# Altium PCB PCB.pcbdoc
Units mil, origin at the board's own origin, x right, y up, seen from the top; angles counter-clockwise.
Board outline 3189.56 x 3700 mil, 2 copper layers (Top Layer, Bottom Layer); 37 components, 55 nets, 146 pads, 56 vias.
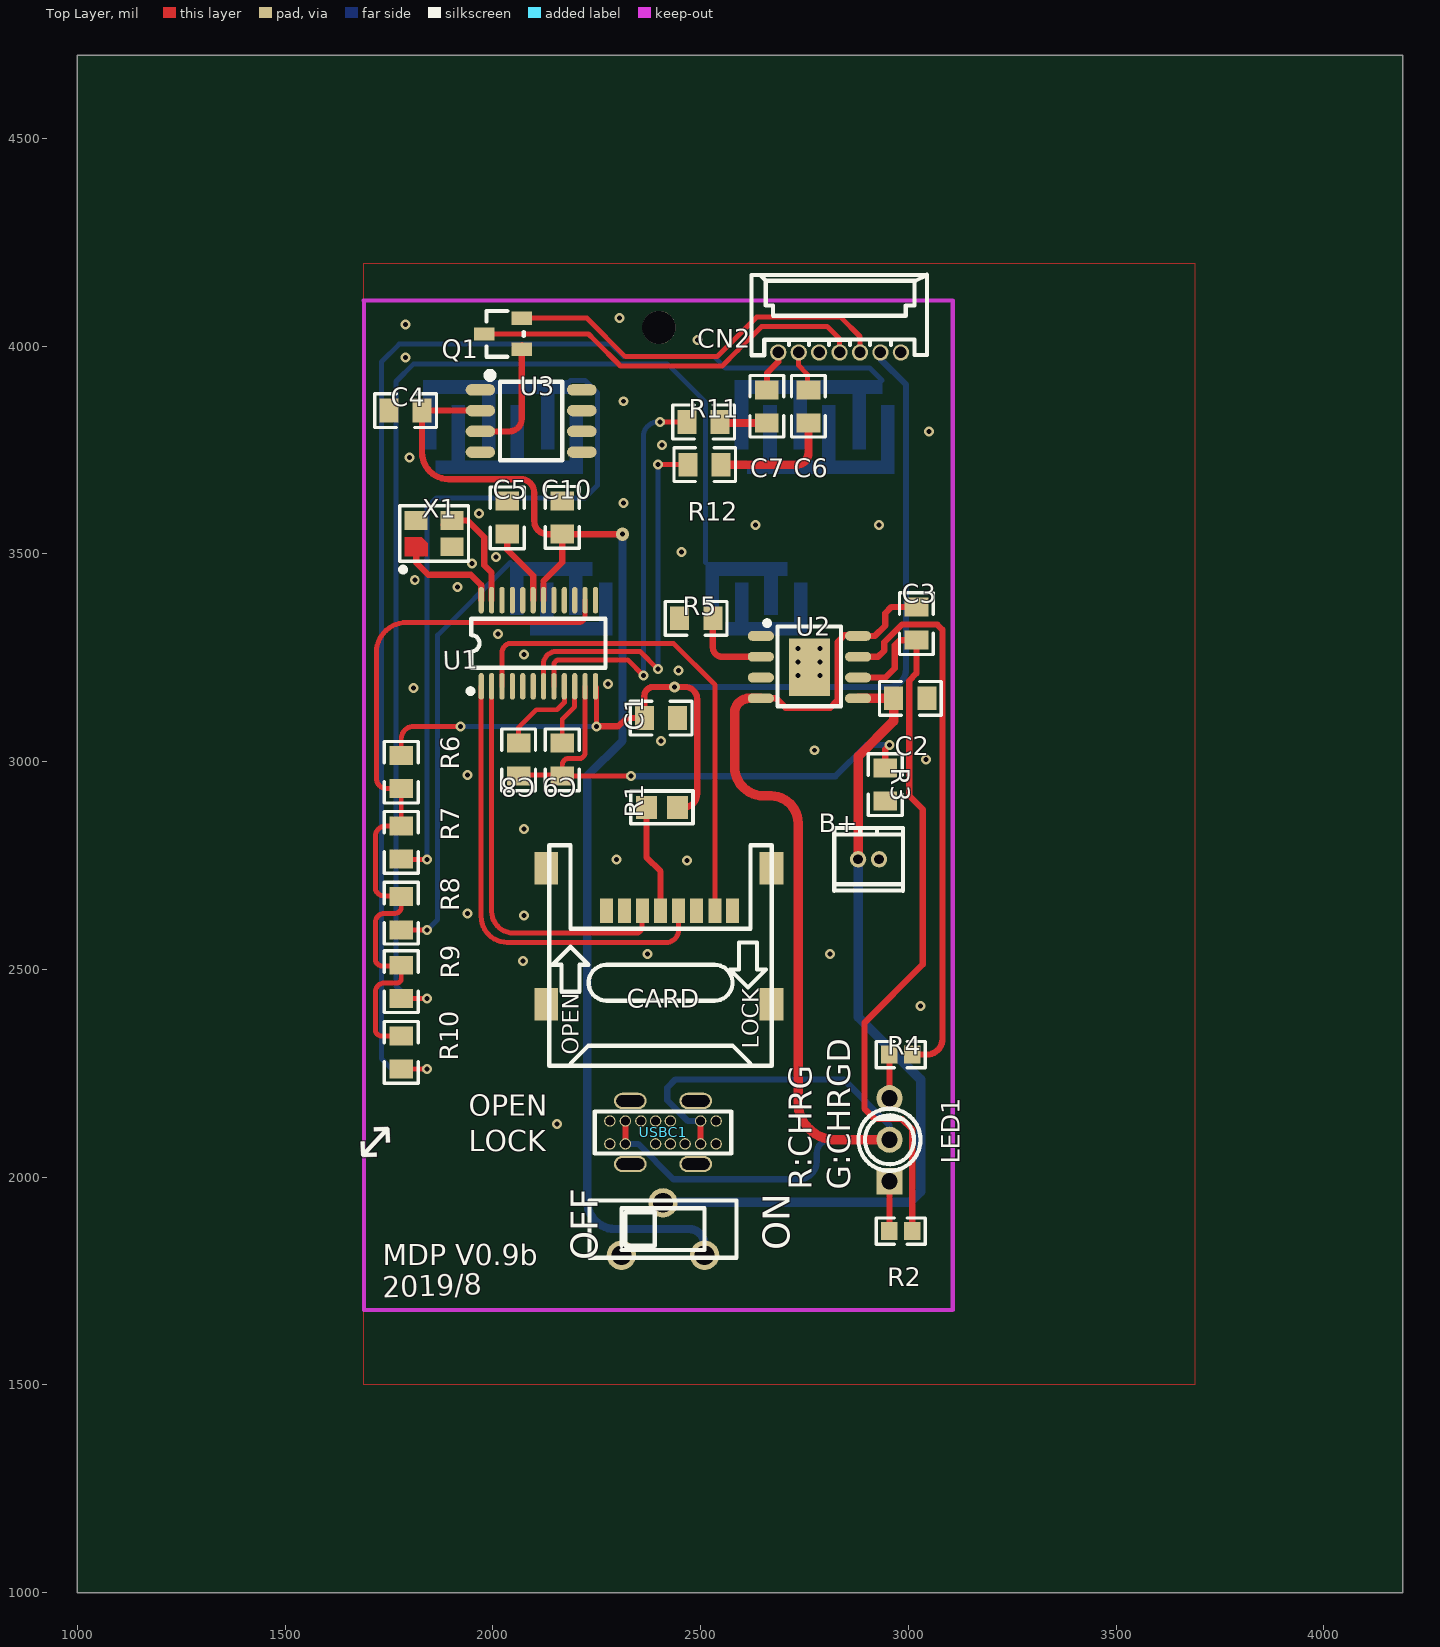
[diagram p0: Top Layer view]
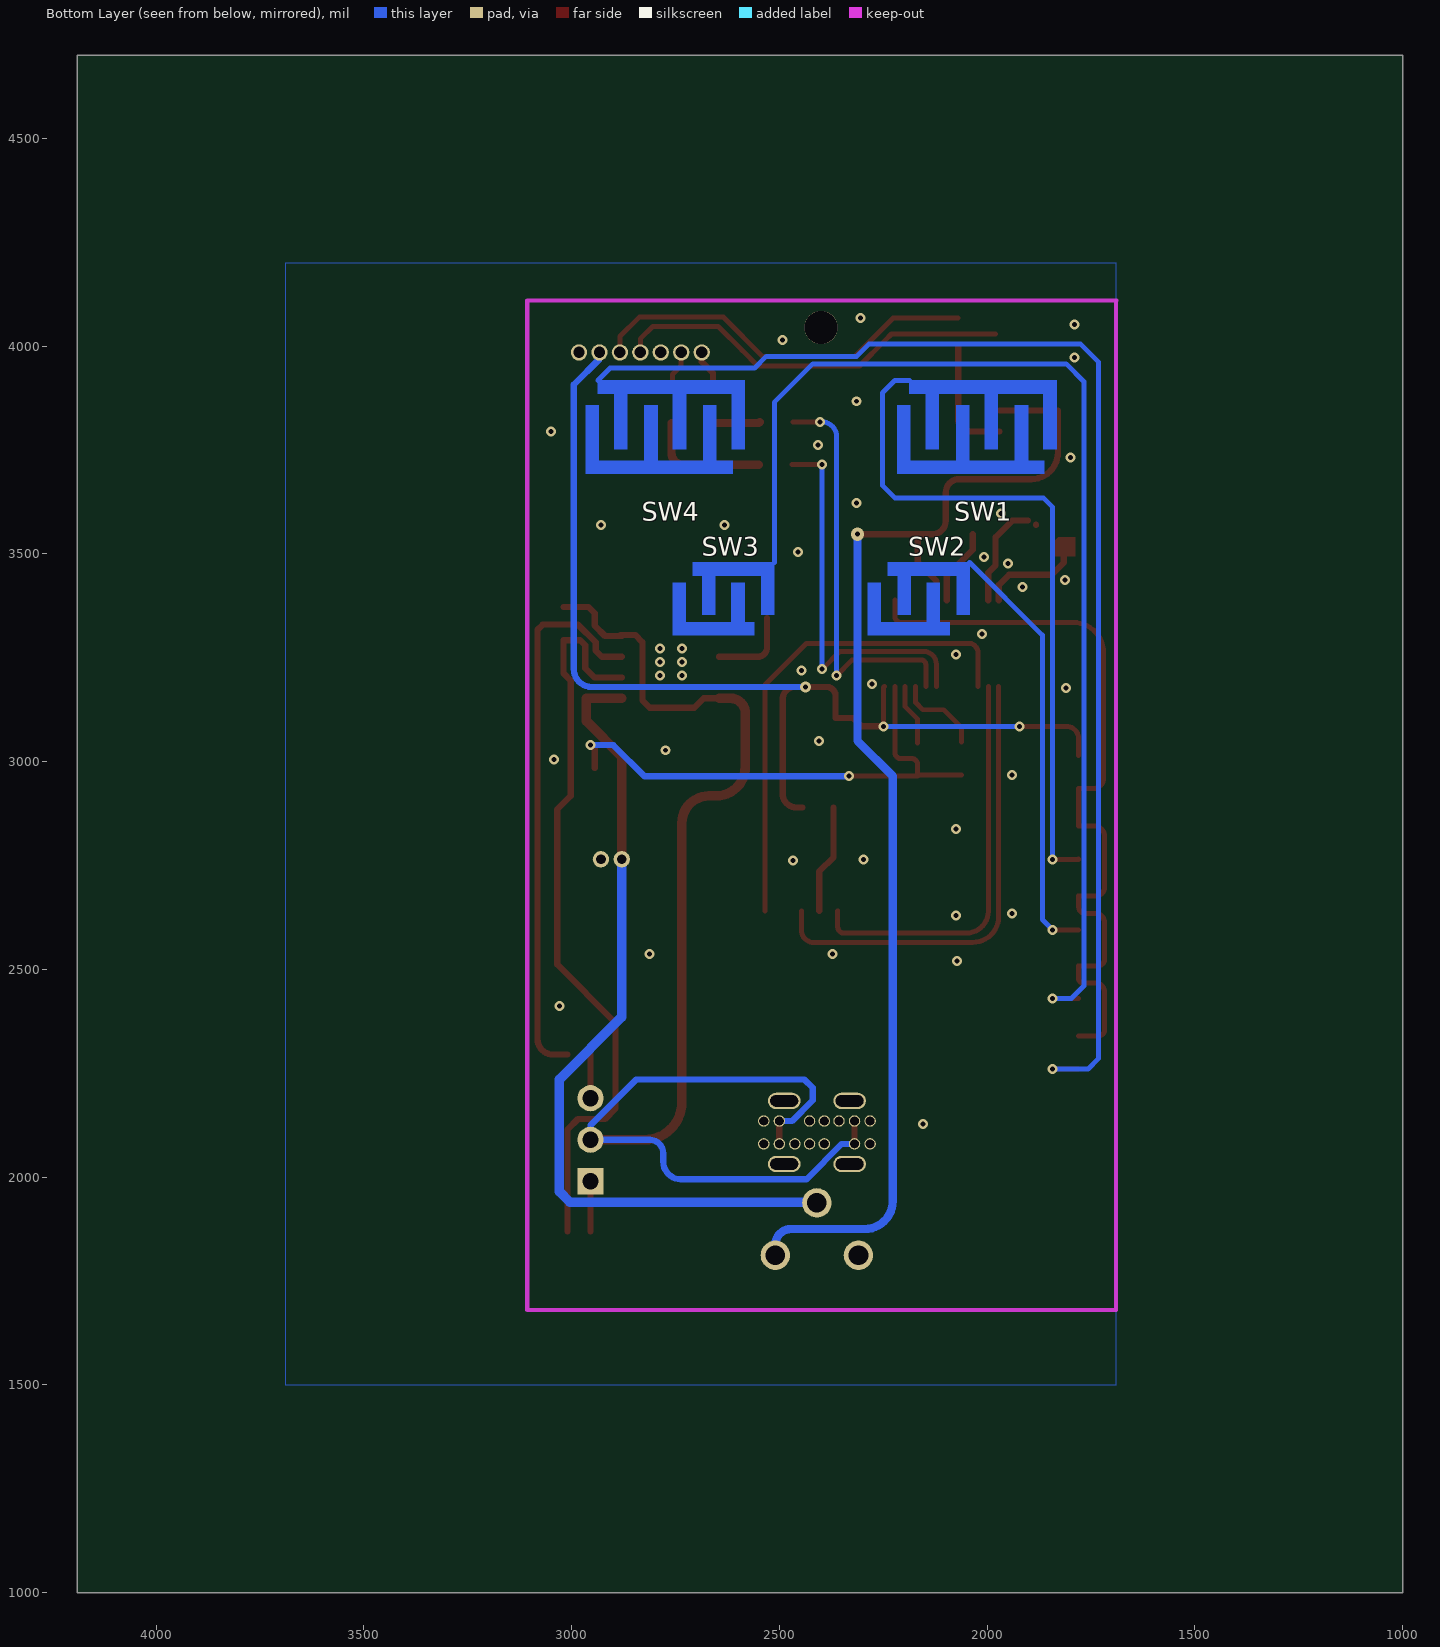
[diagram p1: Bottom Layer view, seen from below]

## Layer stack, top to bottom
Top Layer: signal copper (thickness not stored)
Dielectric: dielectric 12.6, FR-4, Dk 4.8
Bottom Layer: signal copper (thickness not stored)

## Board outline
4189.56,1000 1000,1000 1000,4700 4189.56,4700

## Components (designator, comment, footprint, x,y, rotation, side; value= is the part's Value field where it differs from the comment)
B+ "1.25T-2P-DP" 1.25T-2P-DP 2904.36,2765 r0 top
C1 "1uF" 0805 2404.56,3105 r180 top
C2 "10uF" 0805 3004.56,3152.5 r180 top
C3 "10uF" 0805 3019.56,3332.5 r90 top
C4 "1uF" 0805 1789.56,3845 r180 top
C5 "1uF" 0805 2034.56,3587.5 r90 top
C6 "10uF" 0805 2759.56,3855 r270 top
C7 "10uF" 0805 2659.56,3855 r270 top
C8 "1uF" 0805 2062.06,3005 r90 top
C9 "1uF" 0805 2167.06,3005 r90 top
C10 "10uF" 0805 2167.06,3587.5 r270 top
CARD "HYC40-TF08-150" TF-002-H18 2399.58,2580.01 r0 top
CN2 "1251R-7P" 1.25T-1-7AW 2834.56,3985 r0 top
LED1 "TJ-L3FYTXHMCYLC2R2G-A5" LED-DIP-3P(3.8MM) 2954.56,2090 r90 top
OFF "K3-1235D-L1" SW-DIP-9X3.5-3.5-3P 2409.56,1875 r90 top
Q1 "9013M-H" SOT-23 2024.56,4030 r90 top
R1 "4.7" R0805 2406.96,2890 r180 top
R2 "1K" 0603 2982,1870 r180 top
R3 "0" 0805 2944.56,2945 r90 top
R4 "1K" 0603 2982,2295 r0 top
R5 "1.4K" 0805 2489.56,3345 r0 top
R6 "22K" 0805 1779.56,2975 r90 top
R7 "0" 0805 1779.54,2805.58 r270 top
R8 "6.2K" 0805 1779.56,2635 r270 top
R9 "3K" 0805 1779.56,2470 r270 top
R10 "9.1K" 0805 1779.54,2300 r270 top
R11 "10" 0805 2507.06,3817.5 r180 top
R12 "10" 0805 2509.56,3715 r180 top
SW1 "PP" 硅胶按键 2024.56,3805 r0 bottom
SW2 "NEXT/VOL+" 硅胶按键-5 2164.56,3391.9 r0 bottom
SW3 "PERV/VOL-" 硅胶按键-5 2634.56,3391.9 r0 bottom
SW4 "MODE" 硅胶按键 2774.56,3805 r0 bottom
U1 "KT1025" QSOP-24_24PIN-L8.2-W6.0-H1.72-PITCH0.635-BL 2109.56,3285 r0 top
U2 "TP4056" SOP-8_EP_150MIL 2762.06,3227.5 r0 top
U3 "STC15F104E-35I-SOP8" SOP-8_150MIL 2092.06,3820 r0 top
USBC1 "TYPE-C母头 14PIN 直立式 DIP" TTPE-C-USB-14P 2409.55,2107.56 r180 top
X1 "24MHz" OSC-YSX-3225_4P 1858.75,3549 r0 top

## Footprints (in the part's own frame and the unit in brackets; to place one, negate y for a bottom-side part, rotate by r counter-clockwise, add the part's x,y. Pads: shape width x height; smd on the part's side, far side on the other; paste and mask are expansions set on the pad)
1.25T-1-7AW [mm]
  round 1 hole 0.7: 1(-3.75,0) 2(-2.501,0) 3(-1.251,0) 4(-0.001,0) 5(1.248,0) 6(2.498,0) 7(3.75,0)
  silkscreen extent -5.38,-0.17 5.34,4.75
1.25T-2P-DP [mm]
  round 1 hole 0.6: 1(-0.64,0) 2(0.64,0)
  silkscreen extent -2.1,-1.92 2.1,1.92
0603 [mm]
  rect 1x1.1 smd: 1(-0.7,0) 2(0.7,0)
  silkscreen extent -1.5,-0.8 1.5,0.8
0805 [mm]
  rect 1.16x1.45 smd: 1(-1.016,0) 2(1.016,0)
  silkscreen extent -1.9,-1.03 1.87,1.04
LED-DIP-3P(3.8MM) [mm]
  rect 1.6x1.6 hole 1: 1(-2.54,0)
  round 1.6 hole 1: 2(0,0) 3(2.54,0)
  silkscreen extent -1.9,-1.9 1.9,1.9
OSC-YSX-3225_4P [mm]
  round 0 smd: 1(-1.1,-0.8)
  rect 1.4x1.15 smd: 2(1.1,-0.8) 3(1.1,0.8) 4(-1.1,0.8)
  Top Layer region: -1.8,-0.225 -0.762,-0.225 -0.4,-0.604 -0.4,-1.375 -1.8,-1.375
  silkscreen extent -2.1,-2.35 2.1,1.7
QSOP-24_24PIN-L8.2-W6.0-H1.72-PITCH0.635-BL [mm]
  oval 0.32x1.63 smd: 1(-3.492,-2.635) 2(-2.857,-2.635) 3(-2.222,-2.635) 4(-1.587,-2.635) 5(-0.953,-2.635) 6(-0.318,-2.635) 7(0.318,-2.635) 8(0.953,-2.635) 9(1.587,-2.635) 10(2.222,-2.635) 11(2.857,-2.635) 12(3.492,-2.635) 13(3.492,2.635) 14(2.857,2.635) 15(2.222,2.635) 16(1.587,2.635) 17(0.953,2.635) 18(0.318,2.635) 19(-0.318,2.635) 20(-0.953,2.635) 21(-1.587,2.635) 22(-2.222,2.635) 23(-2.857,2.635) 24(-3.492,2.635)
  silkscreen extent -4.3,-3.08 4.1,1.5
R0805 [mil]
  rect 51.2x55.1 smd: 1(-37.4,0) 2(37.4,0)
  silkscreen extent -75,-39 75,39
SOP-8_150MIL [mm]
  oval 1.8x0.7 smd: 1(-3.099,1.905) 2(-3.099,0.635) 3(-3.099,-0.635) 4(-3.099,-1.905) 5(3.099,-1.905) 6(3.099,-0.635) 7(3.099,0.635) 8(3.099,1.905)
  silkscreen extent -2.71,-2.4 1.91,2.99
SOP-8_EP_150MIL [mm]
  oval 1.6x0.6 smd: 1(-2.972,1.905) 2(-2.972,0.635) 3(-2.972,-0.635) 4(-2.972,-1.905) 5(2.972,-1.905) 6(2.972,-0.635) 7(2.972,0.635) 8(2.972,1.905)
  rect 2.5x3.5 smd: 9(0,0)
  silkscreen extent -2.74,-2.39 1.93,2.84
SOT-23 [mil]
  rect 31.89x50 smd: 1(-37.5,-45) 2(37.5,-45) 3(-0.5,45)
  silkscreen extent -56,-50 54,40
SW-DIP-9X3.5-3.5-3P [mm]
  round 1.8 hole 1.2: 1(-1.6,2.54) 2(1.6,0) 3(-1.6,-2.54)
  silkscreen extent -1.75,-4.5 1.75,4.5
TF-002-H18 [mm]
  rect 0.8x1.5 smd: 1(-3.194,1.554) 2(-2.094,1.554) 3(-0.993,1.554) 4(0.105,1.554) 5(1.208,1.554) 6(2.311,1.554) 7(3.431,1.546) 8(4.514,1.554)
  rect 1.45x2 smd: 9(6.88,4.146) 10(-6.88,4.154) 11(-6.88,-4.154) 12(6.88,-4.154)
  silkscreen extent -6.7,-7.93 6.9,5.55
TTPE-C-USB-14P [mm]
  oval 2x1 hole 0.7 slot 1.7 at 0 deg: 0(-2,1.93) 0(-2,-1.93) 0(2,1.93) 0(2,-1.93)
  round 0.7 hole 0.5 slot 0.525 at 0 deg: 1(-3.25,-0.7) 2(-2.3,-0.7) 3(-0.45,-0.7) 4(0.45,-0.7) 5(1.35,-0.7) 6(2.3,-0.7) 7(3.25,-0.7) 8(3.25,0.7) 9(2.3,0.7) 10(0.45,0.7) 11(-0.45,0.7) 12(-1.35,0.7) 13(-2.3,0.7) 14(-3.25,0.7)
  silkscreen extent -4.17,-1.28 4.17,1.28
硅胶按键 [mil]
  round 0 smd: 1(162.5,-112.5) 2(-162.5,112.5)
  Top Layer region: 162.5,-112.5 162.5,-81 123.13,-81 123.13,52.85 91.63,52.85 91.63,-81 -18.6,-81 -18.6,52.85 -50.1,52.85 -50.1,-81 -160.34,-81 -160.34,52.85 -191.83,52.85 -191.83,-81 -191.83,-112.5
  Top Layer region: -162.5,112.5 -162.5,81 -123.13,81 -123.13,-52.85 -91.63,-52.85 -91.63,81 18.6,81 18.6,-52.85 50.1,-52.85 50.1,81 160.34,81 160.34,-52.85 191.83,-52.85 191.83,81 191.83,112.5
硅胶按键-5 [mil]
  round 0 smd: 1(-122.5,-87.5) 2(122.5,87.5)
  Top Layer region: 122.5,87.5 -74.35,87.5 -74.35,56 -50.73,56 -50.73,-38.48 -19.23,-38.48 -19.23,56 91,56 91,-38.48 122.5,-38.48
  Top Layer region: -122.5,-87.5 74.35,-87.5 74.35,-56 50.73,-56 50.73,38.48 19.23,38.48 19.23,-56 -91,-56 -91,38.48 -122.5,38.48

## Free pads (board coordinates)
  round 80 hole 80 unplated: ""(2399.56,4045)

## Via types
v1: diameter 24, hole 12, Top Layer to Bottom Layer, 54 vias
v2: diameter 32, hole 12, Top Layer to Bottom Layer, 1 vias
v3: diameter 26, hole 12, Top Layer to Bottom Layer, 1 vias

## Nets (pads, with @x,y where several pads share a name; then routed paths per layer and width w, separated by ;. In a path a pad name is that pad's centre, name@x,y a point inside that pad or via, vN(x,y) a via of type N, cw(c..) or ccw(c..) an arc to the next point about the centre after c; other vN are vias at no path point)
+3.3V: C1.2 CN2.6 R1.1 R6.2 U1.12 | length 2628.7
  Top Layer w12: R6.2 1779.56,3055 cw(c1809.56,3055) 1809.56,3085 v1(1922.06,3085) ; U1.12 2249.56,3178.76 v1(2249.56,3085)
  Top Layer w15: v1(2249.56,3085) 2302.06,3085 2322.06,3105 C1.2 2364.56,3157.5 cw(c2387.06,3157.5) 2387.06,3180 v3(2437.06,3180) 2462.06,3180 cw(c2462.06,3150) 2492.06,3150 2492.06,3062.5 2492.06,2922.5 cw(c2459.56,2922.5) 2459.56,2890 R1.1
  Bottom Layer w12: v1(1922.06,3085) v1(2249.56,3085)
  Bottom Layer w15: v3(2437.06,3180) 2787.06,3180 2899.56,3180 2952.06,3180 ccw(c2952.06,3222.5) 2994.56,3222.5 2994.56,3907.5 2932.91,3969.15 CN2.6@2932.91,3992.5
ADKEY: R6.1 R7.1 R8.1 R9.1 R10.1 U1.14 | length 1879.7
  Top Layer w12: 1717.06,2820 cw(c1742.06,2820) 1742.06,2845 1778.95,2845 ccw(c1778.95,2845.58) R7.1 1779.54,2934.98 1744.56,2935 cw(c1744.56,2960) 1719.56,2960 1719.56,3250 1719.56,3262.5 cw(c1792.06,3262.5) 1792.06,3335 1817.06,3335 1902.06,3335 2149.56,3335 2207.06,3335 ccw(c2207.06,3350) 2222.06,3350 U1.14 ; 1717.06,2825 1717.06,2697.5 ccw(c1737.5,2697.5) 1737.5,2677.06 1779.54,2677.06 1779.56,2650 cw(c1764.56,2650) 1764.56,2635 1739.56,2635 ccw(c1739.56,2612.5) 1717.06,2612.5 1717.06,2572.5 1717.06,2525 ccw(c1733.56,2525) 1733.56,2508.5 1779.56,2508.5 1779.56,2477.5 cw(c1769.56,2477.5) 1769.56,2467.5 1739.56,2467.5 ccw(c1739.56,2445) 1717.06,2445 1717.06,2417.5 1717.06,2355 ccw(c1732.06,2355) 1732.06,2340 R10.1
AGND: C8.1 C9.1 R3.2 U1.11 | length 1242.1
  Top Layer w12: C8.1@2062.06,2967.5 2164.56,2967.5 C9.1 ; U1.11 2222.06,3027.5 2222.06,3022.5 cw(c2207.06,3022.5) 2207.06,3007.5 2182.06,3007.5 ccw(c2182.06,2992.5) 2167.06,2992.5 C9.1 ; v1(2332.06,2965) C9.1
  Top Layer w15: R3.2 2944.56,3030 v1(2954.56,3040)
  Bottom Layer w15: v1(2332.06,2965) 2824.56,2965 2899.56,3040 v1(2954.56,3040)
CARD2_4: CARD.4 R1.2 | length 262.9
  Top Layer w15: R1.2 2369.56,2770 2403.71,2735.85 CARD.4
GND: B+.2 C1.1 C2.1 C4.2 C5.2 C10.1 CARD.6 CARD.9 CARD.10 CARD.11 CARD.12 CN2.3 CN2.7 R3.1 R5.1 SW1.2 SW2.2 SW3.2 SW4.2 U1.22 U2.1 U2.3 U2.9 U3.4 USBC1.0 USBC1.1 USBC1.7 USBC1.8 USBC1.14
  other v1: 2154.56,2127.5 3029.56,2412.5 2072.06,2520 2372.06,2537.5 2812.06,2537.5 2074.56,2630 1939.56,2635 2467.06,2762.5 2297.06,2765 2074.56,2837.5 1939.56,2967.5 3042.06,3005 2774.56,3027.5 2404.56,3050 1809.56,3177.5 2277.06,3187.5 2734.56,3207.5 2787.06,3207.5 2447.06,3220 2734.56,3240 2787.06,3240 2074.56,3257.5 2734.56,3272.5 2787.06,3272.5 2012.06,3307.5 1914.56,3420 1812.06,3437.5 1949.56,3477.5 2007.06,3492.5 2454.56,3505 2632.06,3570 2929.56,3570 1967.06,3597.5 2314.56,3622.5 1799.56,3732.5 2407.06,3762.5 3049.56,3795 2314.56,3867.5 1789.56,3972.5 2492.06,4015 1789.56,4052.5 2304.56,4067.5
HDL: C6.1 CN2.2 | length 99.7
  Top Layer w12: CN2.2 2736.11,3953.45 2757.06,3932.5 2757.06,3897.5 C6.1
HDR: C7.1 CN2.1 | length 103.8
  Top Layer w15: C7.1 2659.56,3935 2686.91,3962.35 CN2.1@2687.06,3987.5
LED1_1: LED1.1 R2.2 | length 120
  Top Layer w15: R2.2@2954.46,1870 LED1.1
null: 
R4_1: LED1.3 R4.1 | length 105
  Top Layer w15: R4.1@2954.46,2295 LED1.3
R11_1: C7.2 R11.1 | length 113.5
  Top Layer w20: R11.1 2549.56,3815 C7.2
R12_1: C6.2 R12.1 | length 298.2
  Top Layer w20: R12.1 2732.06,3715 ccw(c2732.06,3742.5) 2759.56,3742.5 C6.2
S$18: 
S$20: 
S$24: 
S$26: 
S$36: 
S$39: 
S$41: 
S$43: 
S$45: 
S$47: 
S$51: 
S$53: 
S$55: 
S$57: 
S$59: 
S$61: 
S$67: 
S$69: 
S$131: 
S$133: 
SC1: CN2.4 Q1.3 | length 971.2
  Top Layer w12: Q1.3 2230.06,4029.5 2245.06,4014.5 2307.06,3952.5 2552.06,3952.5 2589.56,3990 2647.06,4047.5 2679.56,4047.5 2804.56,4047.5 2834.51,4017.55 CN2.4
SC2: CN2.5 Q1.2 | length 949.5
  Top Layer w12: Q1.2 2226.56,4067.5 2319.06,3975 2539.56,3975 2634.56,4070 2837.06,4070 2883.76,4023.3 CN2.5@2883.76,3985
SDCLK: CARD.5 U1.1 | length 1127.9
  Top Layer w12: U1.1 1972.06,2673.5 1972.06,2627.5 ccw(c2034.56,2627.5) 2034.56,2565 2059.56,2565 2417.06,2565 ccw(c2417.06,2595) 2447.06,2595 2447.06,2641.11 cw(c2447.15,2641.11) CARD.5
SDCMD: CARD.3 U1.2 | length 981.6
  Top Layer w12: U1.2 1997.06,2667 1997.06,2640 ccw(c2049.56,2640) 2049.56,2587.5 2087.06,2587.5 2242.06,2587.5 2344.56,2587.5 ccw(c2344.56,2602.5) 2359.56,2602.5 2359.56,2640.28 cw(c2360.48,2640.28) CARD.3
SDDAT: CARD.7 U1.3 | length 1192.2
  Top Layer w12: U1.3 2022.06,3262.5 cw(c2044.56,3262.5) 2044.56,3285 2072.06,3285 2434.56,3285 2534.56,3185 2534.56,2970 2534.56,2787.5 2534.56,2641.02 ccw(c2534.68,2641.02) CARD.7
SW1_1: R7.2 SW1.1 | length 1642
  Top Layer w12: R7.2 ccw(c1780.12,2765.58) R7.2@1780.12,2765 ; R7.2@1780.16,2765 v1(1842.06,2765)
  Bottom Layer w12: v1(1842.06,2765) 1842.06,3612.5 1864.56,3635 2222.06,3635 2252.06,3665 2252.06,3887.5 2222.06,3917.5 SW1.1
SW2_1: R8.2 SW2.1 | length 1029.7
  Top Layer w12: R8.2 v1(1842.06,2595)
  Bottom Layer w12: v1(1842.06,2595) 1867.06,2620 1867.06,3256.2 1867.06,3281.93 1867.06,3304.4 SW2.1
SW3_1: R9.2 SW3.1 | length 2791.4
  Top Layer w12: R9.2 v1(1842.06,2430)
  Bottom Layer w12: v1(1842.06,2430) 1797.06,2430 1767.06,2460 1767.06,3915 1809.56,3957.5 2419.56,3957.5 2512.06,3865 SW3.1
SW4_1: R10.2 SW4.1 | length 3119.2
  Top Layer w12: R10.2@1779.56,2260 v1(1842.06,2260)
  Bottom Layer w12: v1(1842.06,2260) 1757.06,2260 1732.06,2285 1732.06,3962.5 1774.56,4005 2284.56,4005 2314.01,3975.55 2531.51,3975.55 2559.56,3947.5 2907.06,3947.5 SW4.1
U1_7: R12.2 U1.7 | length 928.5
  Top Layer w12: U1.7 2122.06,3222.5 2122.06,3235 cw(c2152.06,3235) 2152.06,3265 2354.56,3265 v1(2397.06,3222.5) ; v1(2397.06,3715) R12.2
  Bottom Layer w12: v1(2397.06,3222.5) v1(2397.06,3715)
U1_8: R11.2 U1.8 | length 988.9
  Top Layer w12: U1.8 2147.06,3220 2147.06,3232.5 cw(c2159.56,3232.5) 2159.56,3245 2324.56,3245 v1(2362.06,3207.5) ; v1(2402.06,3817.5) R11.2
  Bottom Layer w12: v1(2362.06,3207.5) 2362.06,3760 2362.06,3782.5 cw(c2397.06,3782.5) 2397.06,3817.5 v1(2402.06,3817.5)
U1_9: C8.2 U1.9 | length 208.6
  Top Layer w12: C8.2@2062.06,3047.5 2062.06,3082.5 2104.56,3125 2154.56,3125 2172.06,3142.5 U1.9
U1_10: C9.2 U1.10 | length 148.7
  Top Layer w12: C9.2 2167.06,3102.5 2197.06,3132.5 U1.10
U1_19: C5.1 U1.19 | length 184.6
  Top Layer w15: C5.1 2034.56,3510 2097.06,3447.5 U1.19
U1_23: U1.23 X1.3 | length 253.4
  Top Layer w15: X1.3@1882.06,3570.5 ccw(c1882.56,3570.5) X1.3@1882.56,3570 ; X1.3 1939.56,3580 1979.56,3540 1979.56,3472.5 1997.06,3455 U1.23
U1_24: U1.24 X1.1 | length 253.7
  Top Layer w15: X1.1 1815.44,3479.12 1844.56,3450 1947.06,3450 1972.06,3425 U1.24
U2_2: R5.2 U2.2 | length 198.3
  Top Layer w15: R5.2 2529.56,3275 ccw(c2552.06,3275) 2552.06,3252.5 U2.2
U2_4: C3.2 LED1.2 U2.4 U2.8 USBC1.2 USBC1.6 USBC1.9 USBC1.13 | length 3572.7
  Top Layer w15: USBC1.9 USBC1.6 ; USBC1.13 USBC1.2 ; U2.4 2682.06,3152.5 2704.56,3130 2812.06,3130 2829.56,3147.5 2829.56,3287.5 2847.06,3305 U2.8@2881.56,3305 ; U2.8 2919.56,3302.5 2944.56,3327.5 2944.56,3357.5 2959.56,3372.5 C3.2
  Top Layer w23: U2.4 2617.06,3152.5 ccw(c2617.06,3117.5) 2582.06,3117.5 2582.06,3085 2582.06,2987.5 ccw(c2652.06,2987.5) 2652.06,2917.5 2669.56,2917.5 cw(c2669.56,2852.5) 2734.56,2852.5 2734.56,2835 2734.56,2180 ccw(c2824.56,2180) 2824.56,2090 LED1.2
  Bottom Layer w15: USBC1.9 2349.56,2080 2434.56,1995 2524.56,1995 2737.06,1995 ccw(c2737.06,2037.5) 2779.56,2037.5 2779.56,2057.5 cw(c2812.06,2057.5) 2812.06,2090 LED1.2 2954.56,2125 2844.56,2235 2759.36,2235 2439.56,2235 2419.56,2215 2419.56,2185 2469.46,2135.1 USBC1.2
U2_5: B+.1 C2.2 OFF.2 U2.5 | length 2001.9
  Top Layer w23: U2.5 C2.2 2964.56,3097.5 2879.56,3012.5 2879.56,2765.4 B+.1
  Bottom Layer w23: OFF.2 2411.57,1940 3004.56,1940 3029.56,1965 3029.56,2235 2879.56,2385 2879.56,2764.6 B+.1
U2_6: C3.1 R2.1 U2.6 | length 1796.9
  Top Layer w15: U2.6 2944.56,3202.5 2967.06,3225 2967.06,3280 2979.56,3292.5 C3.1 3019.56,3212.5 3002.06,3195 3002.06,2917.5 3034.56,2885 3034.56,2512.06 2894.56,2372.06 2894.56,2165 2919.56,2140 2984.56,2140 3009.56,2115 R2.1
U2_7: R4.2 U2.7 | length 1330.9
  Top Layer w15: U2.7 2927.06,3252.5 2942.06,3267.5 2942.06,3287.5 2984.56,3330 3069.56,3330 3082.06,3317.5 3082.06,2371.1 3082.06,2332.5 cw(c3044.56,2332.5) 3044.56,2295 R4.2
U3_3: Q1.1 U3.3 | length 294.1
  Top Layer w15: U3.3 2039.56,3795 ccw(c2039.56,3825) 2069.56,3825 Q1.1@2069.56,4002.5
VMCU: C4.1 C10.2 OFF.3 U1.18 U3.2 | length 3050.8
  Top Layer w15: U3.2 C4.1 1829.56,3744.1 ccw(c1893.66,3744.1) 1893.66,3680 2067.06,3680 cw(c2067.06,3647.5) 2099.56,3647.5 2099.56,3579.6 ccw(c2131.66,3579.6) 2131.66,3547.5 C10.2 ; U1.18 2122.06,3435 2167.06,3480 C10.2 ; v2(2312.06,3547.5) C10.2
  Bottom Layer w20: v2(2312.06,3547.5) 2312.06,3050 2227.06,2965 2227.06,1997.4 2227.06,1942.5 ccw(c2294.56,1942.5) 2294.56,1875 2472.06,1875 cw(c2472.06,1837.5) 2509.56,1837.5 OFF.3
pads on no net: CARD.1 CARD.2 CARD.8 OFF.1 U1.4 U1.5 U1.6 U1.13 U1.15 U1.16 U1.17 U1.20 U1.21 U3.1 U3.5 U3.6 U3.7 U3.8 USBC1.3 USBC1.4 USBC1.5 USBC1.10 USBC1.11 USBC1.12 X1.2 X1.4

## Polygon pours and split planes (outlines as drawn)
GND on Bottom Layer (solid): 1689.56,4200 3689.56,4200 3689.56,1500 1689.56,1500
GND on Top Layer (solid): 1689.56,4200 3689.56,4200 3689.56,1500 1689.56,1500

## Silkscreen, mask and mechanical layers (free items; w line width, h text height)
Top Overlay:
  text "OPEN" at 1942.06,2147.5 h50
  text "↕" at 1809.56,2105 h160 r137
  text "LOCK" at 1942.06,2062.5 h50
  text "R:CHRG" at 2767.06,1970 h55 r90
  text "G:CHRGD" at 2860.06,1970 h55 r90
  text "ON" at 2714.56,1824.4 h65 r90
  text "MDP V0.9b" at 1734.56,1787.5 h50
  text "2019/8" at 1735.43,1710.02 h50 r2
Document:
  lines w0.1: 2593.78,2849 2595.78,2851

## Text inside footprints (layer, text, board x,y; h text height)
CARD: Top Overlay "OPEN" at 2207.14,2294.3 h39.37 r90; Top Overlay "LOCK" at 2639.94,2308.9 h39.37 r90